# Altium PCB PCB_Hand_control_conversion_module.pcbdoc
Units mm, origin at the board's own origin, x right, y up, seen from the top; angles counter-clockwise.
Board outline 134.37 x 99.02 mm, 2 copper layers (Top Layer, Bottom Layer); 90 components, 95 nets, 316 pads, 615 vias.
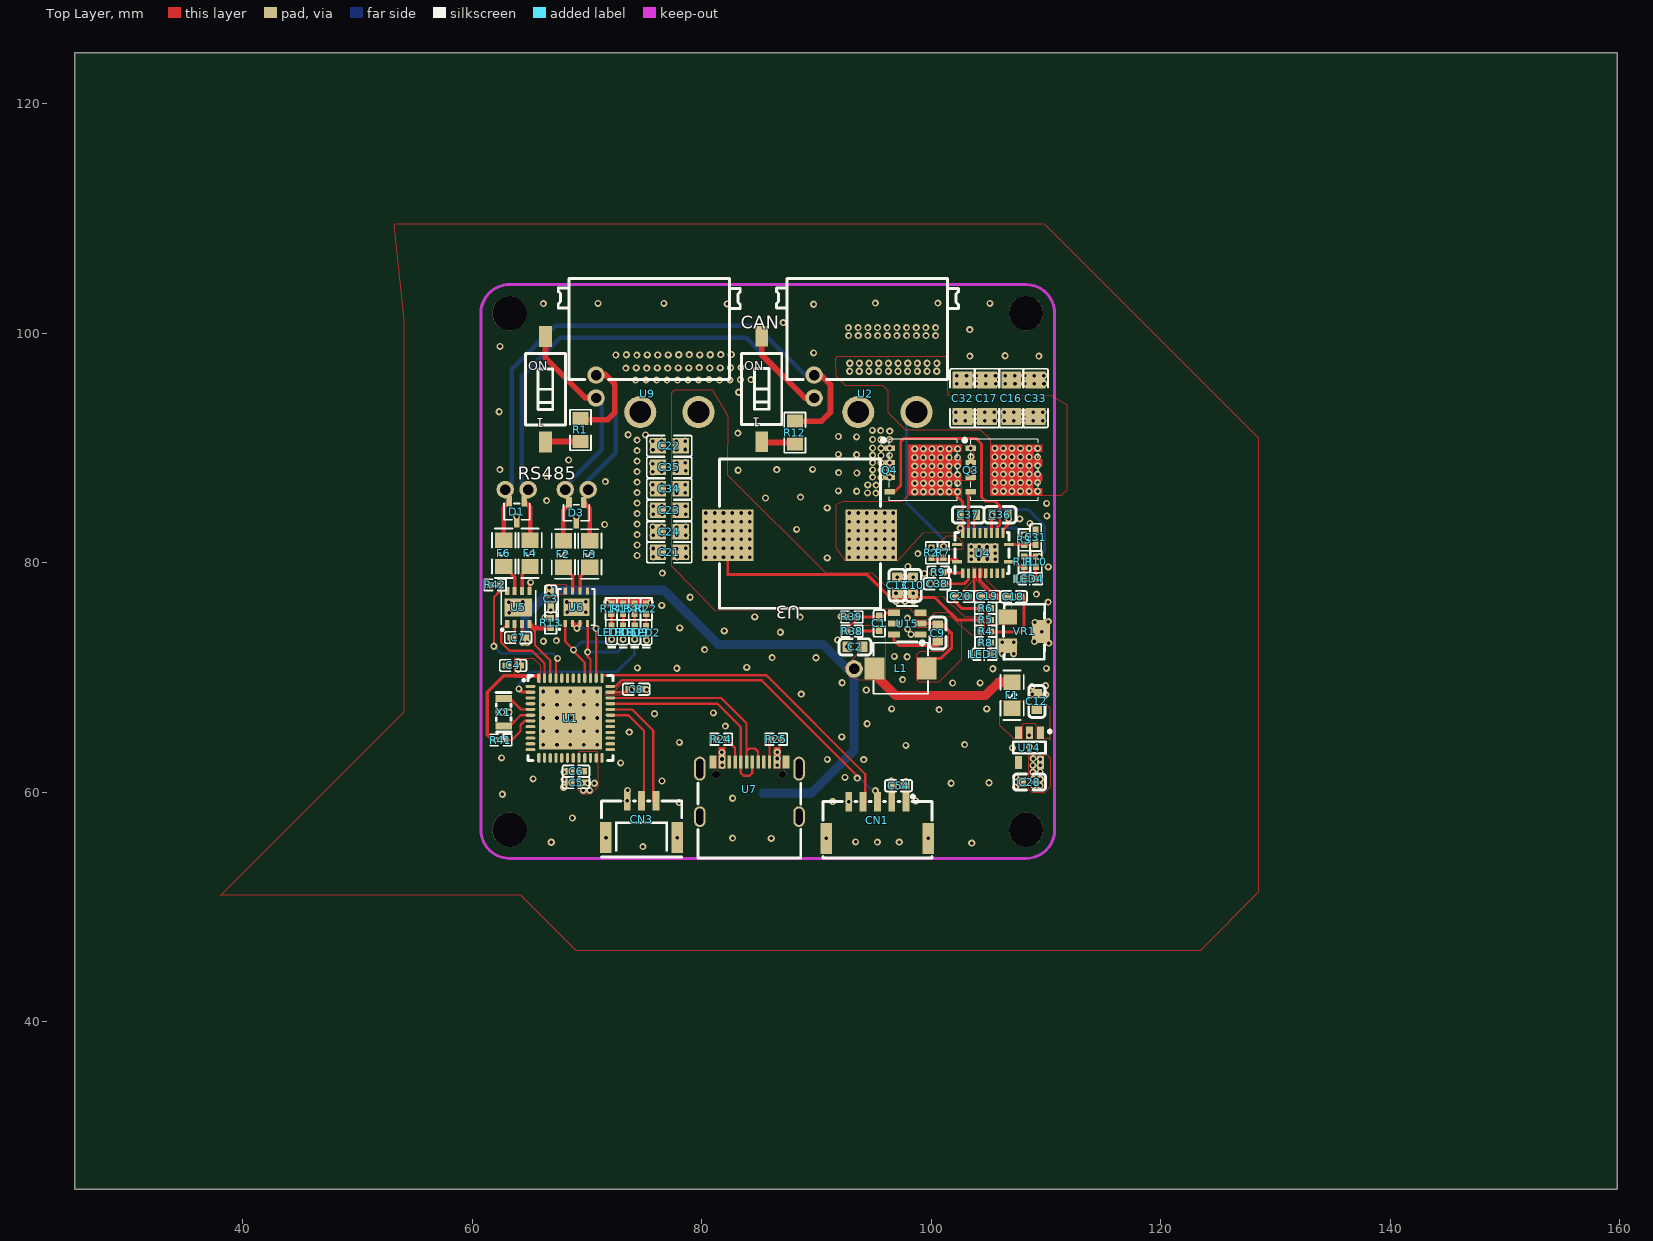
[diagram p0: Top Layer view]
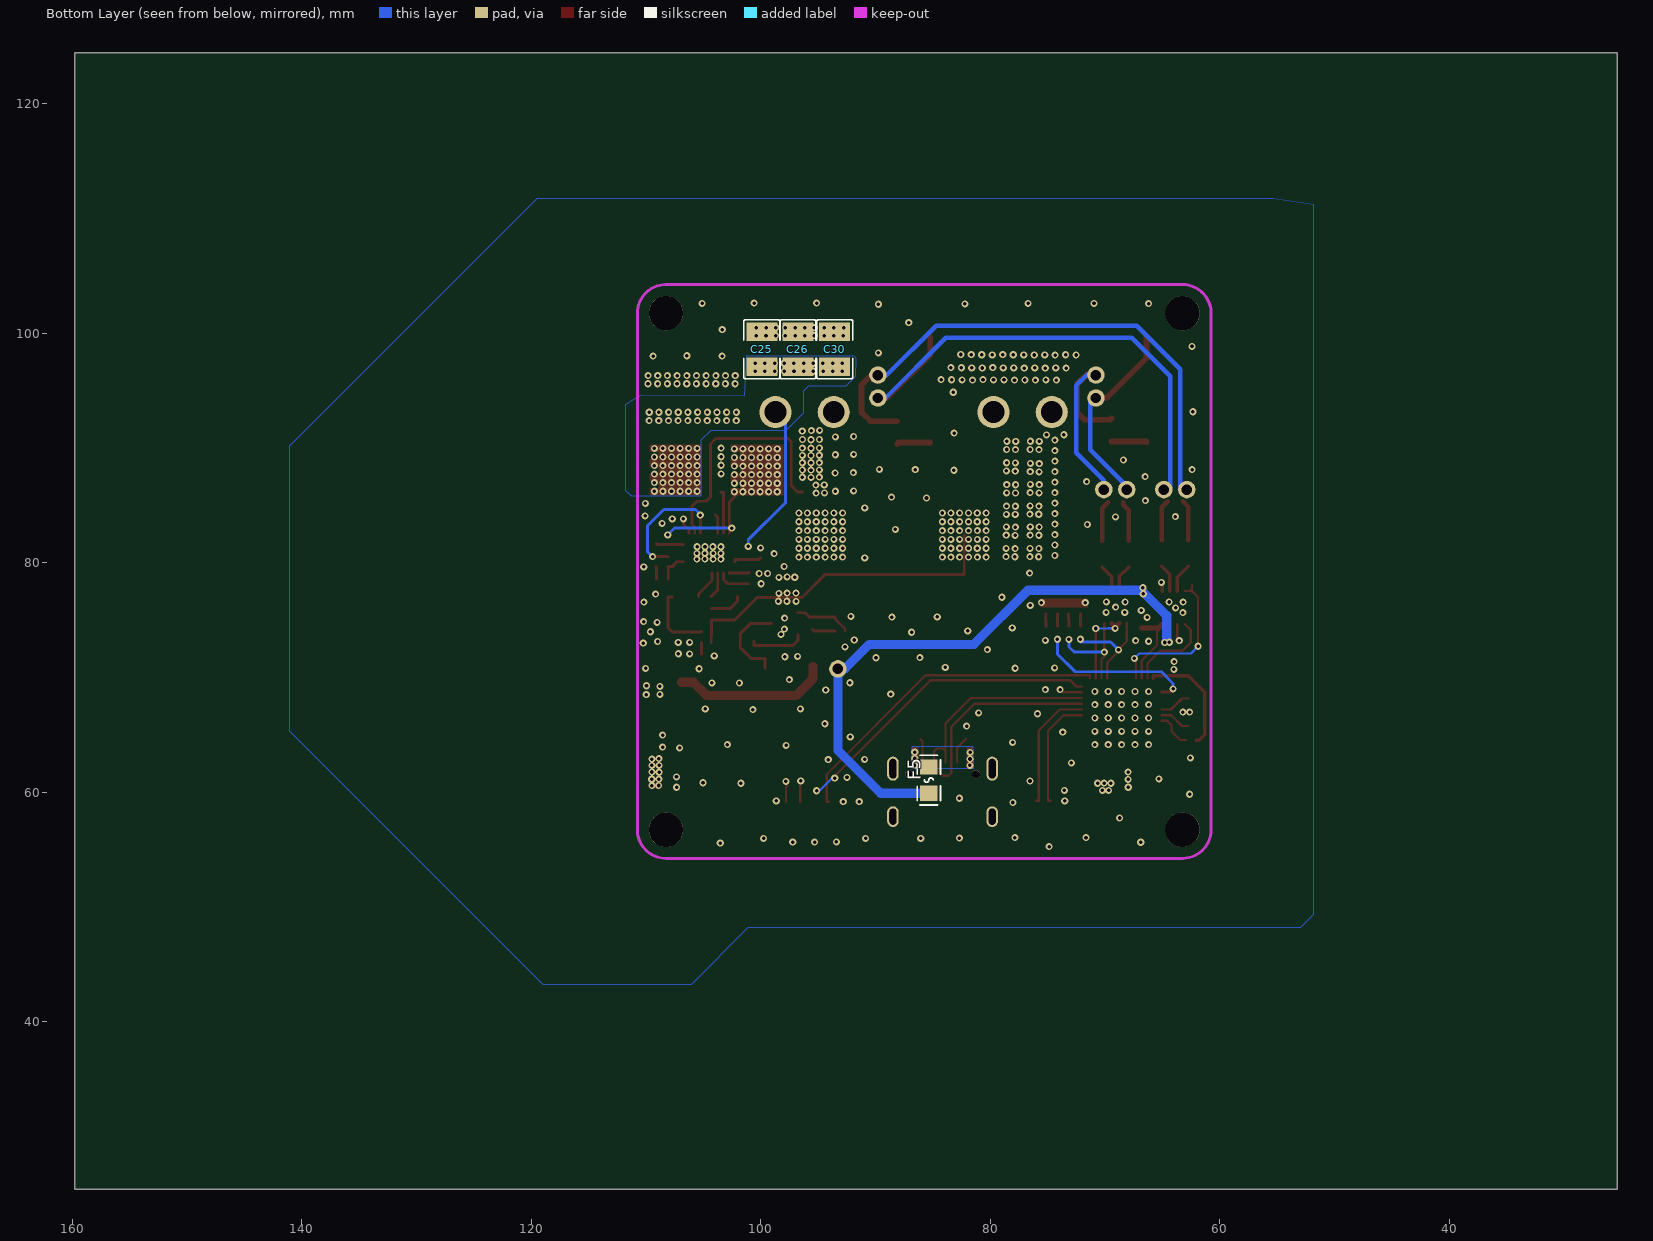
[diagram p1: Bottom Layer view, seen from below]

## Layer stack, top to bottom
Top Layer: signal copper (thickness not stored)
Dielectric: dielectric 0.32, FR-4, Dk 4.8
Bottom Layer: signal copper (thickness not stored)

## Board outline
159.77,25.4 25.4,25.4 25.4,124.42 159.77,124.42

## Components (designator, comment, footprint, x,y, rotation, side; value= is the part's Value field where it differs from the comment)
C1 "47pF" C0402 95.49,74.71 r270 top
C2 "47uF" C0603#1 93.37,72.67 r0 top
C3 "100nF" C0402 66.85,76.86 r270 top
C4 "100nF" C0402 63.58,71.05 r0 top
C5 "100nF" C0402 69.06,60.84 r0 top
C6 "1uF" C0402 69.06,61.84 r0 top
C7 "100nF" C0402 64.02,73.48 r180 top
C8 "100nF" C0402 74.31,68.98 r180 top
C9 "100nF" C0603#1 100.59,73.87 r270 top
C10 "10uF" C0603#1 98.43,78.03 r270 top
C12 "1uF" C0603#1 109.22,67.91 r270 top
C13 "100nF" C0603#1 97.05,78.04 r270 top
C16 "4.7uF" C1206 106.983,94.34 r270 top
C17 "4.7uF" C1206 104.867,94.34 r270 top
C18 "1.2nF" C0402 107.18,77.03 r0 top
C19 "120pF" C0402 104.88,77.06 r180 top
C20 "4.7nF" C0402 102.57,77.06 r0 top
C21 "22uF" C0805 77.19,80.91 r180 top
C22 "22uF" C0805 77.19,90.18 r180 top
C23 "22uF" C0805 77.19,84.57 r180 top
C24 "22uF" C0805 77.19,82.7 r180 top
C25 "100uF" C1210 99.918,98.6 r90 bottom
C26 "100uF" C1210 96.77,98.6 r90 bottom
C28 "1uF" C0603#1 108.59,60.89 r180 top
C30 "100uF" C1210 93.568,98.6 r90 bottom
C31 "12pF" C0402 109.11,82.22 r90 top
C32 "4.7uF" C1206 102.75,94.34 r270 top
C33 "4.7uF" C1206 109.1,94.34 r270 top
C34 "22uF" C0805 77.19,86.44 r180 top
C35 "22uF" C0805 77.19,88.31 r180 top
C36 "2.2uF" C0603#2 106.01,84.18 r180 top
C37 "100nF" C0603#2 103.24,84.17 r180 top
C38 "1uF" C0402 100.52,78.17 r0 top
C54 "100nF" C0402 97.16,60.57 r180 top
CAN "DSIC01LS-P" SW-SMD_DSIC01LS-P 85.24,95.15 r0 top
CN1 "A1257WR-S-5P" CONN-SMD_A1257WR-S-5P 95.32,57.58 r0 top
CN3 "A1257WR-S-3P" CONN-SMD_A1257WR-S-3P 74.77,57.65 r0 top
D1 "TPD2E007DCKR" SOT-323-3_L2.0-W1.3-P1.30-LS2.1-BR 63.9,84.45 r90 top
D3 "TPD2E007DCKR" SOT-323-3_L2.0-W1.3-P1.30-LS2.1-BR 69.09,84.36 r90 top
F1 "JK-SMD0805-050" F0805#1 107.06,68.45 r270 top
F2 "JK-SMD0805-050" F0805#1 67.96,80.76 r90 top
F3 "JK-SMD0805-050" F0805#1 70.26,80.76 r90 top
F4 "JK-SMD0805-050" F0805#1 65.06,80.82 r90 top
F5 "JK-SMD0805-050" F0805#2 85.37,61.06 r270 bottom
F6 "JK-SMD0805-050" F0805#1 62.76,80.82 r90 top
L1 "10uH" IND-SMD_L4.5-W4.5_SMMS0420 97.35,70.8 r0 top
LED2 "TZ-P2-0402RTIA1-0.45T" LED0402-RD_RED 75.17,73.92 r90 top
LED3 "SZYY0402B" LED0402-RD_BLUE 104.63,72.03 r0 top
LED4 "TZ-P2-0402RTIA1-0.45T" LED0402-RD_RED 108.58,78.6 r0 top
LED6 "TZ-P2-0402YGTIA1-0.45T" LED0402-RD_GREEN 73.16,73.93 r90 top
LED8 "TZ-P2-0402 0TIA1-0.45T" LED0402-RD_ORANGE 72.16,73.94 r90 top
LED9 "SZYY0402B" LED0402-RD_BLUE 74.17,73.94 r90 top
Q3 "BSC070N10NS5(ES)" TDSON-8_L5.9-W5.2-P1.27-BL-1 105.24,88.08 r270 top
Q4 "BSC070N10NS5(ES)" TDSON-8_L5.9-W5.2-P1.27-BL-1 98.16,88.08 r270 top
R1 "120Ω" R0805 69.45,91.57 r270 top
R2 "8.25kΩ" R0402 100.03,80.86 r270 top
R3 "511Ω" R0402 108.12,81.99 r270 top
R4 "93.1kΩ" R0402 104.75,74.02 r180 top
R5 "22.1kΩ" R0402 104.75,75.02 r180 top
R6 "8.45kΩ" R0402 104.75,76.03 r180 top
R7 "120kΩ" R0402 101.06,80.87 r90 top
R8 "12.4kΩ" R0402 104.76,73.05 r180 top
R9 "33kΩ" R0402 100.61,79.17 r0 top
R10 "2.2kΩ" R0402 109.15,80.08 r270 top
R11 "20kΩ" R0402 108.11,80.09 r90 top
R12 "120Ω" R0805 88.13,91.34 r270 top
R13 "10kΩ" R0402 66.85,74.75 r270 top
R14 "1kΩ" R0402 72.13,75.98 r90 top
R15 "1kΩ" R0402 73.147,75.98 r90 top
R22 "1kΩ" R0402 75.18,75.98 r270 top
R24 "5.1kΩ" R0402 81.73,64.62 r180 top
R25 "5.1kΩ" R0402 86.52,64.62 r0 top
R38 "100kΩ" R0402 93.11,74.04 r0 top
R39 "13.7kΩ" R0402 93.1,75.28 r0 top
R40 "1kΩ" R0402 74.163,75.98 r90 top
R41 "10kΩ" R0402 62.52,64.55 r180 top
R42 "4.7kΩ" R0402 62.01,78.07 r0 top
RS485 "DSIC01LS-P" SW-SMD_DSIC01LS-P 66.4,95.12 r0 top
U1 "STM32G431CBU6" VQFN-48_L7.0-W7.0-P0.50-BL-EP5.5 68.57,66.47 r270 top
U2 "XT30(2+2)PW-M.G.B" CONN-TH_4P-XT30PW-M 94.27,94.74 r180 top
U3 "5.6uH" IND-SMD_L13.8-W12.6 88.53,82.41 r180 top
U4 "LM5146RGYR" VQFN-20_L4.5-W3.5-P0.50-BL-EP 104.51,80.84 r0 top
U5 "TJA1042TK/3/1J" HVSON-8_L3.0-W3.0-P0.65-BL-EP 64.04,76.1 r0 top
U6 "SIT3088ETK" DFN-8_L3.0-W3.0-P0.65-BL-EP 69.09,76.13 r0 top
U7 "TYPE C-DB-116PWB" USB-TYPE-C-SMD_TYPEC-DB-116PWB 84.17,60.25 r0 top
U9 "XT30(2+2)PW-M.G.B" CONN-TH_4P-XT30PW-M 75.27,94.74 r180 top
U14 "AP2112K-3.3TRG1" SOT-25-5_L2.9-W1.6-P0.95-LS2.8-BL 108.57,63.9 r180 top
U15 "TPS54302DDCR" SOT-23-6_L2.9-W1.6-P0.95-LS2.8-BL 97.92,74.69 r90 top
VR1 "5kΩ" RES-ADJ-SMD_3224W 108.13,74.02 r270 top
X1 "8MHz" OSC-SMD_3P-L3.2-W1.3-P1.20-L 62.76,66.98 r90 top

## Footprints (in the part's own frame and the unit in brackets; to place one, negate y for a bottom-side part, rotate by r counter-clockwise, add the part's x,y. Pads: shape width x height; smd on the part's side, far side on the other; paste and mask are expansions set on the pad)
C0402 [mm]
  rect 0.79x0.54 smd paste-100 mask+0.051: 1(-0.545,0) 2(0.545,0)
  silkscreen extent -1.17,-0.5 1.17,0.5
C0603#1 [mm]
  rect 0.8x0.9 smd paste+0 mask+0.051: 1(-0.7,0) 2(0.7,0)
  silkscreen extent -1.39,-0.71 1.39,0.71
C0603#2 [mm]
  rect 0.6x0.9 smd paste+0 mask+0.051: 1(-0.7,0) 2(0.7,0)
  silkscreen extent -1.39,-0.71 1.39,0.71
C0805 [mm]
  rect 1.41x1.35 smd paste-100 mask+0.051: 1(-1,0) 2(1,0)
  silkscreen extent -1.96,-0.9 1.96,0.9
C1206 [mm]
  rect 1.485x1.728 smd paste-100 mask+0.051: 1(-1.593,0) 2(1.593,0)
  silkscreen extent -2.56,-1.09 2.56,1.09
C1210 [mm]
  rect 1.635x2.7 smd paste-100 mask+0.051: 1(1.517,0) 2(-1.517,0)
  silkscreen extent -2.56,-1.58 2.56,1.58
CONN-SMD_A1257WR-S-3P [mm]
  rect 0.6x1.7 smd paste+0 mask+0.051: 1(1.25,1.6) 2(0,1.6) 3(-1.25,1.6)
  rect 1x2.7 smd paste+0 mask+0.051: 4(3.1,-1.6) 5(-3.1,-1.6)
  silkscreen extent -3.5,-3.3 3.5,1.6
CONN-SMD_A1257WR-S-5P [mm]
  rect 0.6x1.7 smd paste+0 mask+0.051: 1(2.499,1.6) 2(1.25,1.6) 3(0,1.6) 4(-1.25,1.6) 5(-2.499,1.6)
  rect 1x2.7 smd paste+0 mask+0.051: 6(4.45,-1.6) 7(-4.45,-1.6)
  silkscreen extent -4.75,-3.3 4.75,2.17
CONN-TH_4P-XT30PW-M [mil]
  round 110.24 hole 74.8 paste+0 mask+1.97: 1(-175.78,63.59) 2(24.22,63.59)
  round 60 hole 36 paste+0 mask+1.97: 3(175.79,15.16) 4(175.79,-63.58)
  silkscreen extent -319,-395 305,-49
DFN-8_L3.0-W3.0-P0.65-BL-EP [mm]
  rect 0.28x0.625 smd paste+0 mask+0.051: 1(-0.975,-1.412) 2(-0.325,-1.412) 3(0.325,-1.412) 4(0.975,-1.412) 5(0.975,1.412) 6(0.325,1.412) 7(-0.325,1.412) 8(-0.975,1.412)
  rect 2.25x1.5 smd paste+0 mask+0.051: 9(0,0)
  silkscreen extent -1.58,-2.01 1.58,1.58
F0805#1 [mm]
  rect 1.335x1.5 smd paste-100 mask+0.051: 1(-1.142,0) 2(1.142,0)
  silkscreen extent -2.16,-1.02 2.16,1.02
F0805#2 [mm]
  rect 1.335x1.5 smd paste-100 mask+0.051: 1(1.142,0) 2(-1.142,0)
  silkscreen extent -2.16,-1.02 2.16,1.02
HVSON-8_L3.0-W3.0-P0.65-BL-EP [mil]
  rect 14x28 smd paste+0 mask+2: 1(-38.39,-56.4) 2(-12.79,-56.4) 3(12.8,-56.4) 4(38.39,-56.4) 5(38.39,56.4) 6(12.8,56.4) 7(-12.79,56.4) 8(-38.39,56.4)
  rect 94.49x62.99 smd paste+0 mask+2: 9(0,0)
  silkscreen extent -59,-81 59,59
IND-SMD_L4.5-W4.5_SMMS0420 [mm]
  rect 1.724x1.92 smd paste+0 mask+0.051: 1(2.278,0) 2(-2.278,0)
  silkscreen extent -2.38,-2.23 2.38,2.23
IND-SMD_L13.8-W12.6 [mm]
  rect 4.5x4.5 smd paste+0 mask+0.051: 1(-6.25,0) 2(6.25,0)
  silkscreen extent -7.05,-6.63 6.95,6.37
LED0402-RD_BLUE [mm]
  rect 0.636x0.54 smd paste-100 mask+0.051: 1(-0.538,0) 2(0.538,0)
  silkscreen extent -1.39,-0.54 1.09,0.54
LED0402-RD_GREEN [mm]
  rect 0.636x0.54 smd paste-100 mask+0.051: 1(-0.538,0) 2(0.538,0)
  silkscreen extent -1.39,-0.54 1.09,0.54
LED0402-RD_ORANGE [mm]
  rect 0.636x0.54 smd paste-100 mask+0.051: 1(-0.538,0) 2(0.538,0)
  silkscreen extent -1.39,-0.54 1.09,0.54
LED0402-RD_RED [mm]
  rect 0.636x0.54 smd paste-100 mask+0.051: 1(-0.508,0) 2(0.508,0)
  silkscreen extent -1.39,-0.54 1.09,0.54
OSC-SMD_3P-L3.2-W1.3-P1.20-L [mm]
  rect 0.6x1.4 smd paste+0 mask+0.051: 1(-1.199,0) 2(0,0) 3(1.199,0)
  silkscreen extent -2.28,-0.65 1.72,0.66
R0402 [mm]
  rect 0.566x0.54 smd paste-100 mask+0.051: 1(-0.433,0) 2(0.433,0)
  silkscreen extent -0.94,-0.5 0.94,0.5
R0805 [mm]
  rect 1.133x1.377 smd paste-100 mask+0.051: 1(-1,0) 2(1,0)
  silkscreen extent -1.76,-0.92 1.76,0.92
RES-ADJ-SMD_3224W [mm]
  rect 1.3x1.6 smd paste+0 mask+0.051: 1(-1.25,-1.45) 3(1.25,-1.45)
  rect 2x1.6 smd paste+0 mask+0.051: 2(0,1.45)
  silkscreen extent -2.36,-1.82 2.47,1.77
SOT-23-6_L2.9-W1.6-P0.95-LS2.8-BL [mm]
  rect 0.532x1.072 smd paste+0 mask+0.051: 1(-0.95,-1.149) 2(0,-1.149) 3(0.95,-1.149) 4(0.95,1.149) 5(0,1.149) 6(-0.95,1.149)
  silkscreen extent -1.82,-1.45 1.54,0.89
SOT-25-5_L2.9-W1.6-P0.95-LS2.8-BL [mil]
  rect 24.5x43.5 smd paste+0 mask+2: 1(-37.39,-51.18) 2(-0.02,-51.18) 3(37.39,-51.18) 4(37.39,51.18) 5(-37.39,51.18)
  silkscreen extent -75,-60 56,20
SOT-323-3_L2.0-W1.3-P1.30-LS2.1-BR [mm]
  rect 0.936x0.5 smd paste+0 mask+0.051: 1(0.898,-0.65) 2(0.898,0.65) 3(-0.898,0)
  silkscreen extent -0.7,-1.13 0.7,1.13
SW-SMD_DSIC01LS-P [mm]
  rect 1.1x1.8 smd paste+0 mask+0.051: 1(0,-4.6) 2(0,4.6)
  silkscreen extent -1.75,-3.1 1.75,3.1
TDSON-8_L5.9-W5.2-P1.27-BL-1 [mm]
  rect 0.5x0.9 smd paste-100 mask+0.05: 1(-1.905,-1.775) 2(-0.635,-1.775) 3(0.635,-1.775) 4(1.905,-1.775)
  Top Layer region: -2.205,-0.1 2.205,-0.1 2.205,4.45 1.605,4.45 1.605,3.65 0.935,3.65 0.935,4.45 0.335,4.45 0.335,3.65 -0.335,3.65 -0.335,4.45 -0.935,4.45 -0.935,3.65 -1.605,3.65 -1.605,4.45 -2.205,4.45
  silkscreen extent -2.75,-2.46 2.66,4.06
USB-TYPE-C-SMD_TYPEC-DB-116PWB [mm]
  oval 1x2.1 hole 0.6 slot 1.7 at 90 deg paste+0 mask+0.051: 17(4.325,1.805) 20(-4.325,1.805)
  oval 1x1.8 hole 0.6 slot 1.4 at 90 deg paste+0 mask+0.051: 18(4.325,-2.375) 19(-4.325,-2.375)
  rect 0.3x1.14 smd paste-100 mask+0.05: A1(-3.345,2.375) A4(-2.55,2.375) A5(-1.25,2.375) A6(-0.25,2.375) A7(0.25,2.375) A8(1.25,2.375) A9(2.55,2.375) A12(3.355,2.375) B1(3.04,2.375) B4(2.25,2.375) B5(1.75,2.375) B6(0.75,2.375) B7(-0.75,2.375) B8(-1.75,2.375) B9(-2.25,2.375) B12(-3.04,2.375)
  round 0.7 hole 0.7 unplated paste+0: ""(-2.89,1.305) ""(2.89,1.305)
  silkscreen extent -4.47,-5.98 4.47,0.54
VQFN-20_L4.5-W3.5-P0.50-BL-EP [mm]
  rect 0.85x0.28 smd paste+0 mask+0.051: 1(-2.25,-0.752) 10(2.25,-0.752) 11(2.25,0.748) 20(-2.25,0.75)
  rect 0.28x0.85 smd paste+0 mask+0.051: 2(-1.749,-1.75) 3(-1.248,-1.75) 4(-0.749,-1.75) 5(-0.248,-1.75) 6(0.251,-1.75) 7(0.752,-1.75) 8(1.251,-1.75) 9(1.752,-1.75) 12(1.752,1.75) 13(1.251,1.75) 14(0.75,1.748) 15(0.25,1.748) 16(-0.25,1.748) 17(-0.75,1.748) 18(-1.25,1.748) 19(-1.75,1.748)
  rect 2.7x1.7 smd paste+0 mask+0.051: 21(0,-0.002)
  silkscreen extent -3.05,-1.78 2.29,1.78
VQFN-48_L7.0-W7.0-P0.50-BL-EP5.5 [mm]
  oval 0.28x0.85 smd paste-100 mask+0.05: 1(-2.75,-3.475) 2(-2.25,-3.475) 3(-1.75,-3.475) 4(-1.25,-3.475) 5(-0.75,-3.475) 6(-0.25,-3.475) 7(0.25,-3.475) 8(0.75,-3.475) 9(1.25,-3.475) 10(1.75,-3.475) 11(2.25,-3.475) 12(2.75,-3.475) 25(2.75,3.475) 26(2.25,3.475) 27(1.75,3.475) 28(1.25,3.475) 29(0.75,3.475) 30(0.25,3.475) 31(-0.25,3.475) 32(-0.75,3.475) 33(-1.25,3.475) 34(-1.75,3.475) 35(-2.25,3.475) 36(-2.75,3.475)
  oval 0.85x0.28 smd paste-100 mask+0.05: 13(3.475,-2.75) 14(3.475,-2.25) 15(3.475,-1.75) 16(3.475,-1.25) 17(3.475,-0.75) 18(3.475,-0.25) 19(3.475,0.25) 20(3.475,0.75) 21(3.475,1.25) 22(3.475,1.75) 23(3.475,2.25) 24(3.475,2.75) 37(-3.475,2.75) 38(-3.475,2.25) 39(-3.475,1.75) 40(-3.475,1.25) 41(-3.475,0.75) 42(-3.475,0.25) 43(-3.475,-0.25) 44(-3.475,-0.75) 45(-3.475,-1.25) 46(-3.475,-1.75) 47(-3.475,-2.25) 48(-3.475,-2.75)
  rect 5.5x5.5 smd paste-100 mask+0.05: 49(0,0)
  silkscreen extent -3.7,-4.16 3.7,3.7

## Free pads (board coordinates)
  round 1.524 hole 0.914 paste+0 mask+0.05: 3(64.89,86.37) 3(68.12,86.37) 3(93.29,70.75) 4(62.89,86.37) 4(70.12,86.37)
  round 3 hole 3 unplated paste+0: ""(63.27,56.74) ""(63.27,101.74) ""(108.27,56.74) ""(108.27,101.74)

## Via types
v1: diameter 0.62, hole 0.31, Top Layer to Bottom Layer, tented both sides, 615 vias

## Nets (pads, with @x,y where several pads share a name; then routed paths per layer and width w, separated by ;. In a path a pad name is that pad's centre, name@x,y a point inside that pad or via, vN(x,y) a via of type N, cw(c..) or ccw(c..) an arc to the next point about the centre after c; other vN are vias at no path point)
+3.3V: C4.2 C5.2 C6.2 C8.2 C28.1 C54.2 CN1.2 R14.2 R15.2 R22.1 R40.2 R41.2 U1.20 U1.21 U1.23 U1.35 U1.48 U5.5 U14.5 | length 14.1
  Top Layer w0.2: U1.35 73.7,68.72 v1(73.93,68.95) ; CN1.2 96.57,60.525 C54.2
  Top Layer w0.3: R41.2 61.809,64.55 61.339,65.02 61.339,68.731 62.769,70.161 65.819,70.161 U1.48 ; U5.5 65.015,78.195 v1(65.11,78.29)
  other v1: 69.7,60.16 70.24,60.16 108.909,60.588 109.501,60.578 69.51,60.79 70.66,60.79 70.09,60.8 96.53,60.99 109.511,61.134 108.89,61.152 108.871,61.745 109.492,61.764 108.871,62.338 109.501,62.347 109.492,62.883 108.89,62.94 64.02,70.7 63.99,71.39 71.74,76.53 75.56,76.53
+5V: C1.2 C2.2 C3.1 C7.1 F1.1 F5.1 L1.2 pad.3@93.29,70.75 R38.2 U5.3 U6.8 | length 68.5
  Top Layer w0.2: U5.3 64.365,73.495 v1(64.81,73.05)
  Top Layer w0.254: R38.2 95.365,74.04 C1.2
  Top Layer w0.8: L1.2@95.449,70.946 95.449,69.909 96.929,68.428 104.722,68.428 105.883,69.589 F1.1@106.929,69.589
  Bottom Layer w0.8: 64.631,73.32 64.631,75.391 66.851,77.611 76.721,77.611 81.44,72.889 90.559,72.889 92.7,70.75 pad.3@93.29,70.75 ; F5.1 89.557,59.917 93.29,63.65 pad.3@93.29,70.75
  other v1: 64.41,73.07 66.68,77.28 66.72,77.82
A: D3.1 F3.2 pad.4@70.12,86.37 R1.1 U9.4 | length 23.3
  Top Layer w0.4: D3.1@69.739,85.258 70.259,84.738 F3.2
  Top Layer w0.5: R1.1 69.55,92.47 71.82,92.47 72.43,93.08 72.43,95.59 71.615,96.405 U9.4@70.915,96.405
  Bottom Layer w0.4: pad.4@70.12,86.371 70.12,87.184 72.51,89.574 72.51,95.449 71.555,96.404 U9.4@70.915,96.404
B: D3.2 F2.2 pad.3@68.12,86.37 RS485.2 U9.3 | length 21.1
  Top Layer w0.4: F2.2 67.961,84.56 68.441,85.04 D3.2
  Top Layer w0.5: RS485.2 66.401,97.849 69.845,94.405 U9.3@70.915,94.405
  Bottom Layer w0.4: pad.3@68.121,86.371 68.121,86.666 71.311,89.856 71.311,94.405 U9.3@70.915,94.405
C9_1: C9.1 L1.1 U15.2 | length 7.7
  Top Layer w0.254: U15.2@99.068,74.69 100.92,74.69 101.801,73.808 101.801,72.602 100.849,71.649 99.627,71.649 L1.1@99.627,70.801
C9_2: C9.2 U15.6 | length 4.9
  Top Layer w0.254: U15.6 96.772,73.219 97.191,72.8 100.59,72.8 C9.2
C19_2: C19.2 C20.2 U4.4 | length 2.3
  Top Layer w0.254: U4.4 103.761,77.633 C19.2
CAN_STB: R42.2 U1.45 U5.8 | length 14.4
  Top Layer w0.2: v1(61.91,72.72) 61.91,77.001 62.444,77.532 R42.2 62.444,77.707 62.617,77.532 U5.8@63.064,77.532 ; U1.45 67.32,71.53 v1(67.46,71.67)
  Bottom Layer w0.2: v1(61.91,72.72) 62.53,72.1 67.03,72.1 v1(67.46,71.67)
CANH: D1.2 F6.2 pad.4@62.89,86.37 R12.1 U2.4 | length 51.9
  Top Layer w0.4: F6.2 62.76,84.858 D1.2
  Top Layer w0.5: R12.1 90.45,92.34 91.23,93.12 91.23,95.51 90.384,96.356 U2.4
  Bottom Layer w0.4: pad.4@62.891,86.368 63.45,86.368 63.45,96.861 67.239,100.651 84.73,100.651 89.025,96.356 U2.4
CANL: CAN.2 D1.1 F4.2 pad.3@64.89,86.37 U2.3 | length 50.6
  Top Layer w0.4: D1.1@64.549,85.347 65.06,84.837 F4.2@65.06,81.962
  Top Layer w0.5: CAN.2@85.24,99.67 85.24,98.129 89.015,94.354 U2.3@89.805,94.354
  Bottom Layer w0.4: pad.3@64.89,86.368 64.539,86.368 64.331,86.579 64.331,96.239 67.679,99.589 83.909,99.589 89.144,94.354 U2.3@89.805,94.354
F1_2: C12.2 F1.2 U14.1 U14.3
FDCAN_RX: R13.2 U1.46 U5.4 | length 7.4
  Top Layer w0.2: U5.4@65.014,74.667 65.014,74.484 65.489,74.009 65.489,72.81 66.82,71.479 U1.46
  Top Layer w0.4: U5.4 65.365,74.317 R13.2
FDCAN_TX: U1.47 U5.1 | length 7.7
  Top Layer w0.2: U5.1@63.064,74.667 62.54,74.143 62.54,73.059 63.259,72.34 65.22,72.34 66.32,71.24 U1.47
GND: C2.1 C3.2 C4.1 C5.1 C6.1 C7.2 C8.1 C10.1 C12.1 C13.1 C16.1 C17.1 C21.2 C22.2 C23.2 C24.2 C25.1 C26.1 C28.2 C30.1 C31.2 C32.1 C33.1 C34.2 C35.2 C36.1 C38.1 C54.1 CN1.1 CN1.5 CN1.6 CN1.7 CN3.3 CN3.4 CN3.5 D1.3 D3.3 LED2.1 LED3.1 Q4.1 Q4.2 Q4.3 R2.1 R9.1 R13.1 R24.2 R25.2 R39.1 R42.1 U1.49 U2.2 U4.6 U4.12 U4.15 U4.21 U5.2 U5.9 U6.5 U6.9 U7.17 U7.18 U7.19 U7.20 U7.A1 U7.A12 U7.B1 U7.B12 U9.2 U14.2 U15.1 VR1.2 VR1.3 X1.2 | length 4.4
  Top Layer w0.2: v1(63.55,73.21) 63.715,73.376 U5.2 ; C54.1 97.819,60.456 CN1.1
  Top Layer w0.254: U4.12 106.261,82.871 106.76,83.37 v1(106.76,83.82)
  other v1: 74.88,55.26 103.543,55.568 66.9,55.64 95.32,55.65 97.23,55.65 93.42,55.67 86.07,55.98 90.87,55.98 99.77,55.98 82.7,56 71.67,56.05 77.87,56.05 68.75,57.76 78.04,59.11 91.43,59.18 92.821,59.18 73.52,59.25 98.663,59.248 82.7,59.48 62.65,59.83 73.55,60.16 107.35,60.433 67.99,60.44 101.739,60.782 105.045,60.833 97.82,60.95 76.55,60.98 68,61.12 65.32,61.16 92.5,61.29 107.356,61.342 68,61.75 72.94,62.56 94.13,62.85 90.96,62.87 62.58,62.99 107.085,63.872 108.571,63.937 97.802,64.084 66.21,64.15 67.405,64.15 68.57,64.15 69.735,64.15 70.9,64.15 102.914,64.158 78.07,64.35 92.21,64.83 108.568,64.984 73.7,65.24 66.21,65.305 67.405,65.305 68.57,65.305 69.735,65.305 70.9,65.305 82.07,65.77 94.428,65.966 66.21,66.47 67.405,66.47 68.57,66.47 69.735,66.47 70.9,66.47 75.9,66.84 81.03,66.91 62.65,66.98 63.23,66.98 100.703,67.205 96.558,67.26 104.845,67.26 66.21,67.635 67.405,67.635 68.57,67.635 69.735,67.635 70.9,67.635 109.986,68.513 108.808,68.533 88.683,68.552 66.21,68.78 67.405,68.78 68.57,68.78 69.735,68.78 70.9,68.78 94.35,68.91 75.21,68.95 108.801,69.233 109.97,69.278 101.877,69.519 92.25,69.54 104.275,69.535 97.516,69.81 105.383,70.763 110.04,70.793 77.848,70.81 74.407,70.842 83.935,70.885 86.143,71.729 89.97,71.72 97.903,71.806 96.796,71.843 104.068,71.883 106.205,72.052 107.184,72.066 80.272,72.436 92.67,72.67 110.255,73 106.209,73.053 107.206,73.062 109.003,73.137 66.21,73.16 67.35,73.21 75.21,73.24 91.87,73.27 98.25,73.76 86.874,73.947 109.628,73.985 81.979,74.069 97.95,74.21 78.102,74.329 109.047,74.801 110.218,74.877 97.93,75.18 66.35,75.24 88.582,75.259 84.63,75.28 92.156,75.322 63.23,75.66 68.3,75.68 69.92,75.68 66.86,75.85 63.86,76.07 69.09,76.13 76.535,76.288 63.21,76.57 64.43,76.58 68.27,76.58 69.9,76.59 110.201,76.572 79,76.99 109.175,77.267 99.975,78.17 97.05,78.74 98.43,78.73 97.72,78.765 99.42,79.06 100.15,79.06 76.59,79.1 110.212,79.638 97.98,79.67 103.49,80.32 104.171,80.311 104.882,80.323 105.574,80.31 90.955,80.417 75.795,80.525 76.569,80.537 74.39,80.63 98.85,80.8 105.574,80.81 103.49,80.82 104.171,80.811 104.882,80.823 75.779,81.241 76.553,81.254 100.03,81.293 103.49,81.39 104.18,81.39 104.87,81.39 105.56,81.39 74.39,81.544 75.771,82.397 76.545,82.409 74.39,82.458 88.28,82.9 75.755,83.113 76.529,83.126 71.555,83.333 74.39,83.372 108.607,83.429 107.729,83.82 69.1,83.99 63.88,84.02 110.086,84.083 75.788,84.222 76.562,84.234 74.39,84.285 90.95,84.78 75.772,84.938 76.546,84.951 110.066,85.175 74.39,85.199 66.5,85.41 85.57,85.64 88.62,85.72 94.46,86.09 95.185,86.07 74.39,86.113 75.764,86.094 76.538,86.106 93.509,86.232 91.922,86.261 95.205,86.77 94.48,86.79 75.748,86.81 76.522,86.822 74.39,87.027 71.617,87.066 94.91,87.46 95.635,87.44 96.387,87.445 66.52,87.5 93.53,87.82 91.943,87.849 74.39,87.941 75.759,87.923 76.533,87.936 83.19,88.06 94.91,88.095 95.635,88.075 96.387,88.08 62.423,88.114 86.55,88.11 89.67,88.13 75.744,88.639 76.518,88.652 94.91,88.73 95.635,88.71 96.387,88.715 74.39,88.854 68.42,88.95 94.91,89.365 95.635,89.345 96.387,89.35 93.503,89.414 91.916,89.443 74.39,89.768 75.766,89.853 76.54,89.866 94.91,90 95.635,89.98 96.387,89.985 75.747,90.577 76.521,90.589 74.39,90.682 94.91,90.74 95.635,90.72 96.374,90.74 93.507,90.971 91.92,91 75.117,91.138 73.603,91.152 83.17,91.3 96.394,91.465 95.605,91.51 94.88,91.53 62.363,93.156 83.24,94.86 102.25,95.6 103.093,95.6 103.936,95.6 104.78,95.6 105.623,95.6 106.466,95.6 107.31,95.6 108.153,95.6 108.996,95.6 109.839,95.6 74.249,95.91 76.077,95.907 76.991,95.922 77.904,95.911 81.56,95.918 75.163,95.929 78.818,95.927 79.732,95.935 82.474,95.934 83.387,95.942 80.646,95.951 84.301,95.958 102.24,96.3 103.083,96.3 103.926,96.3 104.77,96.3 105.613,96.3 106.456,96.3 107.3,96.3 108.143,96.3 108.986,96.3 109.829,96.3 73.399,96.96 75.227,96.957 77.054,96.961 74.313,96.979 76.141,96.972 77.968,96.977 78.882,96.985 80.71,96.968 81.624,96.984 79.796,97.001 82.537,96.992 83.451,97.008 103.38,98.01 109.39,98.01 106.45,98.04 72.529,98.1 74.357,98.097 76.184,98.101 73.443,98.119 75.271,98.112 77.098,98.117 78.012,98.125 79.84,98.108 80.754,98.124 81.667,98.132 78.926,98.141 82.581,98.148 89.76,98.28 62.435,98.847 92.81,99.79 93.653,99.79 94.496,99.79 95.34,99.79 96.183,99.79 97.026,99.79 97.87,99.79 98.713,99.79 99.556,99.79 100.399,99.79 103.37,100.31 92.8,100.49 93.643,100.49 94.486,100.49 95.33,100.49 96.173,100.49 97.016,100.49 97.86,100.49 98.703,100.49 99.546,100.49 100.389,100.49 87.12,100.92 89.767,102.526 82.223,102.552 66.222,102.582 70.974,102.601 76.714,102.602 105.12,102.6 95.14,102.62 100.59,102.62
LED2_2: LED2.2 R22.2 | length 1.1
  Top Layer w0.254: LED2.2 R22.2
LED8_2: LED8.2 R14.1 | length 1.1
  Top Layer w0.254: R14.1 72.16,75.517 LED8.2
LED9_2: LED9.2 R40.1 | length 1.1
  Top Layer w0.254: LED9.2 R40.1@74.17,75.547
PC13: LED9.1 U1.2 | length 14
  Top Layer w0.254: v1(64.08,69.01) 64.37,68.72 U1.2
  Bottom Layer w0.254: v1(64.08,69.01) 64.08,69.48 65.1,70.5 72.61,70.5 74.17,72.06 v1(74.17,73.33)
R3_1: C37.2 Q3.1 Q3.2 Q3.3 R3.1 U3.1 U4.19 | length 12.8
  Top Layer w0.254: v1(100.071,88.423) 100.071,87.989 102.759,85.299 U4.19@102.759,82.589
  Bottom Layer w0.254: v1(102.54,83.02) 107.524,83.021 v1(108.12,82.423)
  other v1: 92.875,80.497 93.643,80.497 94.411,80.497 95.179,80.497 95.947,80.497 96.685,80.497 92.875,81.265 93.643,81.265 94.411,81.264 95.179,81.264 95.947,81.264 96.685,81.265 92.875,82.032 93.643,82.032 94.411,82.032 95.179,82.032 95.947,82.032 96.685,82.032 92.875,82.8 93.643,82.8 94.411,82.8 95.179,82.8 95.947,82.8 96.685,82.8 92.875,83.568 93.643,83.568 94.411,83.568 95.179,83.568 95.947,83.568 96.685,83.568 92.875,84.336 93.643,84.336 94.411,84.336 95.179,84.336 95.947,84.336 96.685,84.336 98.579,86.185 99.325,86.185 100.071,86.185 100.817,86.185 101.563,86.185 102.309,86.185 98.579,86.931 99.325,86.931 100.071,86.931 100.817,86.931 101.563,86.931 102.309,86.931 98.579,87.677 99.325,87.677 100.071,87.677 100.817,87.677 101.563,87.677 102.309,87.677 103.464,87.748 98.579,88.423 99.325,88.423 100.817,88.423 101.563,88.423 102.309,88.423 103.464,88.493 98.579,89.169 99.325,89.169 100.071,89.169 100.817,89.169 101.563,89.169 102.309,89.169 103.464,89.239 98.579,89.915 99.325,89.915 100.071,89.915 100.817,89.915 101.563,89.915 102.309,89.915 103.464,89.985
R3_2: C31.1 R3.2 U4.11 | length 2.4
  Top Layer w0.254: U4.11 109.023,81.588 C31.1
R4_1: C18.2 R4.1 | length 6.1
  Top Layer w0.254: R4.1@105.182,74.019 105.222,73.981 107.74,73.981 108.09,74.329 108.09,77.029 C18.2@107.724,77.029
R6_1: C18.1 C19.1 R5.1 R6.1 U4.5 VR1.1 | length 2.5
  Top Layer w0.254: U4.5 104.261,78.448 105.425,77.285 C19.1
R6_2: C20.1 R6.2 | length 3
  Top Layer w0.254: C20.1@102.025,77.059 102.025,76.655 102.649,76.031 R6.2@104.316,76.031
R7_1: R2.2 R7.1 U4.1 | length 2.5
  Top Layer w0.254: R2.2 100.158,80.3 102.261,80.3 U4.1@102.261,80.087
R8_1: LED3.2 R8.1 | length 1
  Top Layer w0.254: LED3.2 R8.1
R9_2: R9.2 U4.2 | length 1.8
  Top Layer w0.254: R9.2@101.042,79.17 101.042,79.089 U4.2@102.761,79.089
R10_1: C36.2 R10.1 R11.2 U4.14 | length 11.3
  Top Layer w0.254: U4.14 105.26,84.13 C36.2 105.29,84.16 v1(105.29,84.15) ; R11.2 108.117,80.53 v1(109.44,80.53)
  Bottom Layer w0.254: v1@105.289,84.151 105.289,84.23 105.7,84.639 108.461,84.639 109.871,83.229 109.871,80.961 v1@109.439,80.529
R10_2: LED4.2 R10.2 | length 1.1
  Top Layer w0.254: LED4.2 109.088,79.585 R10.2
R11_1: LED4.1 R11.1 U4.10 | length 2.6
  Top Layer w0.254: U4.10@106.759,80.087 107.303,80.087 107.732,79.658 R11.1 ; LED4.1 108.072,79.619 R11.1
R12_2: CAN.1 R12.2 | length 2.9
  Top Layer w0.5: CAN.1@85.24,90.47 88,90.47 R12.2
R15_1: LED6.2 R15.1 | length 1.1
  Top Layer w0.254: LED6.2 R15.1@73.18,75.538
R24_1: R24.1 U7.A5 | length 2.3
  Top Layer w0.2: R24.1 82.92,63.863 U7.A5
R25_1: R25.1 U7.B5 | length 2.1
  Top Layer w0.2: U7.B5 85.92,64.453 R25.1
S$16733: 
S$16737: 
S$16741: 
S$16745: 
SW1_1: R1.2 RS485.1 | length 3.1
  Top Layer w0.5: RS485.1 66.45,90.57 R1.2
SWCLK: CN1.4 U1.37 | length 29.4
  Top Layer w0.2: U1.37 71.321,70.191 85.649,70.191 94.27,61.57 94.27,59.18 CN1.4@94.069,59.18
SWDIO: CN1.3 U1.36 | length 27.4
  Top Layer w0.2: U1.36 72.49,69.22 73.02,69.75 85.24,69.75 93.57,61.42 v1(93.57,61.24)
  Bottom Layer w0.2: v1(93.57,61.24) 93.79,61.24 94.9,60.13 v1(95.14,60.13)
U1_1: U1.1
U1_3: U1.3
U1_4: U1.4
U1_5: U1.5 X1.3 | length 2.7
  Top Layer w0.2: X1.3 63.301,68.179 64.26,67.22 U1.5
U1_6: U1.6 X1.1 | length 2.7
  Top Layer w0.2: X1.1 63.311,65.781 64.25,66.72 U1.6
U1_7: R41.1 U1.7 | length 3.2
  Top Layer w0.2: R41.1 63.47,64.55 64.23,65.31 64.23,65.85 64.6,66.22 U1.7
U1_8: U1.8
U1_9: U1.9
U1_10: U1.10
U1_11: U1.11
U1_12: U1.12
U1_13: U1.13
U1_14: U1.14
U1_15: U1.15
U1_16: U1.16
U1_17: U1.17
U1_18: U1.18
U1_19: U1.19
U1_22: U1.22
U1_24: U1.24
U1_25: U1.25
U1_26: U1.26
U1_27: U1.27
U1_28: U1.28
U1_29: U1.29
U1_30: U1.30
U1_41: U1.41
U1_42: U1.42
U1_43: U1.43
U1_44: U1.44
U4_3: C38.2 U4.3 | length 2.9
  Top Layer w0.254: C38.2@101.065,78.169 102.891,78.169 103.262,78.543 U4.3@103.262,79.089
U4_9: U4.9
U4_13: Q4.4 U4.13 | length 21.4
  Top Layer w0.254: Q4.4 96.805,86.175 97.359,86.732 97.359,90.559 97.641,90.839 103.919,90.839 104.4,90.359 104.4,85.731 104.77,85.36 105.56,85.36 106,84.921 106,83.341 105.761,83.102 U4.13@105.761,82.589
U4_16: U4.16
U4_17: C37.1 U4.17 | length 1.8
  Top Layer w0.254: U4.17 103.76,83.99 C37.1 103.93,84.16 C37.1@103.93,84.06
U4_18: Q3.4 U4.18 | length 3.8
  Top Layer w0.254: U4.18@103.26,82.588 103.26,86.145 Q3.4@103.465,86.145
U5_6: F4.1 U5.6 | length 2.4
  Top Layer w0.3: U5.6 64.365,78.983 F4.1
U5_7: F6.1 U5.7 | length 2.5
  Top Layer w0.3: F6.1 63.715,78.722 U5.7
U6_6: F3.1 U6.6 | length 2.4
  Top Layer w0.3: U6.6 69.415,78.773 F3.1
U6_7: F2.1 U6.7 | length 2.4
  Top Layer w0.3: F2.1 68.765,78.813 U6.7
U7_A8: U7.A8
U7_B8: U7.B8
U14_4: U14.4
U15_4: C1.1 R38.1 R39.2 U15.4 | length 5
  Top Layer w0.2: R38.1@92.677,74.039 92.677,74.248 93.533,75.104 R39.2@93.533,75.279
  Top Layer w0.254: R39.2 95.79,75.28 96.15,75.64 U15.4@96.771,75.64
U15_5: U15.5
UART1_RX: CN3.1 U1.32 | length 10.9
  Top Layer w0.2: U1.32@72.045,67.219 73.95,67.219 75.789,65.38 75.789,59.249 CN3.1@76.02,59.249
UART1_TX: CN3.2 U1.31 | length 9.8
  Top Layer w0.2: U1.31@72.045,66.719 73.64,66.719 74.989,65.37 74.989,59.249 CN3.2@74.77,59.249
UART4_DE: U1.38 U6.2 U6.3 | length 7.2
  Top Layer w0.2: U1.38 70.82,72.14 v1(70.82,74.27)
  Top Layer w0.4: U6.2 69.14,74.342 v1(69.14,74.28) 69.14,74.442 U6.3
  Bottom Layer w0.2: v1(69.14,74.28) 69.72,74.28 69.73,74.27 v1(70.82,74.27)
UART4_RX: LED8.1 U1.40 U6.1 | length 9.3
  Top Layer w0.2: U6.1 68.116,73.134 v1(68.84,72.41) 68.84,72.29 69.82,71.31 U1.40
  Bottom Layer w0.254: v1(68.84,72.41) 69.52,73.089 72.159,73.089 v1(72.16,73.33)
UART4_TX: LED6.1 U1.39 U6.4 | length 8.8
  Top Layer w0.2: U6.4@70.064,74.717 70.07,74.711 v1(70.07,72.21) 70.07,71.831 70.32,71.581 U1.39
  Bottom Layer w0.254: v1(70.07,72.21) 72.7,72.21 73.16,72.67 v1(73.16,73.32)
USB_D+: U1.34 U7.A6 U7.B6 | length 19.3
  Top Layer w0.2: U1.34 81.72,68.22 83.92,66.02 U7.A6@83.92,62.625 ; U7.A6 83.92,63.58 84.159,63.819 84.662,63.819 84.921,63.56 U7.B6
USB_D-: U1.33 U7.A7 U7.B7 | length 18.4
  Top Layer w0.2: U1.33 81.38,67.72 83.419,65.68 83.419,62.625 83.419,61.69 83.678,61.431 84.181,61.431 84.42,61.669 U7.A7@84.42,62.625
VIN: C16.2 C17.2 C25.2 C26.2 C30.2 C32.2 C33.2 R7.2 U2.1 U4.20 | length 13.9
  Bottom Layer w0.254: U2.1 97.869,93.125 97.869,85.231 101.1,82 v1(101.1,81.43)
  other v1: 105.553,86.23 106.299,86.23 107.045,86.23 107.791,86.23 108.537,86.23 109.283,86.23 105.553,86.976 106.299,86.976 107.045,86.976 107.791,86.976 108.537,86.976 109.283,86.976 105.553,87.722 106.299,87.722 107.045,87.722 107.791,87.722 108.537,87.722 109.283,87.722 105.553,88.468 106.299,88.468 107.045,88.468 107.791,88.467 108.537,88.467 109.283,88.468 105.553,89.213 106.299,89.213 107.045,89.213 107.791,89.213 108.537,89.213 109.283,89.213 105.553,89.959 106.299,89.959 107.045,89.959 107.791,89.959 108.537,89.959 109.283,89.959 102.15,92.39 102.993,92.39 103.836,92.39 104.68,92.39 105.523,92.39 106.366,92.39 107.21,92.39 108.053,92.39 108.896,92.39 109.74,92.39 102.14,93.115 102.983,93.115 103.826,93.115 104.67,93.115 105.513,93.115 106.356,93.115 107.2,93.115 108.043,93.115 108.886,93.115 109.73,93.115 92.899,96.69 93.743,96.69 94.586,96.69 95.429,96.69 96.273,96.69 97.116,96.69 97.959,96.69 98.803,96.69 99.646,96.69 100.489,96.69 92.909,97.38 93.753,97.38 94.596,97.38 95.439,97.38 96.283,97.38 97.126,97.38 97.969,97.38 98.813,97.38 99.656,97.38 100.499,97.38
VOUT: C10.2 C13.2 C21.1 C22.1 C23.1 C24.1 C34.1 C35.1 R4.2 R5.2 R8.2 U3.2 U9.1 U15.3 | length 29.1
  Top Layer w0.254: U3.2@82.281,82.409 82.281,78.99 94.4,78.99 96.409,76.981 100.32,76.981 102.279,75.02 R5.2 ; R4.2 R5.2 ; R4.2@104.318,74.019 R8.2@104.326,73.051
  other v1: 96.93,76.63 97.73,76.64 98.47,76.64 98.43,77.33 96.94,77.35 97.72,77.36 80.375,80.497 81.143,80.497 81.911,80.497 82.679,80.497 83.447,80.497 84.185,80.497 77.871,80.518 78.645,80.53 77.856,81.234 78.63,81.246 80.376,81.265 81.143,81.265 81.911,81.264 82.679,81.264 83.447,81.264 84.185,81.265 80.376,82.032 81.143,82.032 81.911,82.032 82.679,82.032 83.447,82.032 84.185,82.032 77.847,82.389 78.621,82.402 80.376,82.8 81.143,82.8 81.911,82.8 82.679,82.8 83.447,82.8 84.185,82.8 77.832,83.106 78.606,83.118 80.376,83.568 81.143,83.568 81.911,83.568 82.679,83.568 83.447,83.568 84.185,83.568 77.839,84.206 78.613,84.219 80.376,84.336 81.143,84.336 81.911,84.336 82.679,84.336 83.447,84.336 84.185,84.336 77.824,84.922 78.598,84.935 77.815,86.078 78.589,86.091 77.8,86.794 78.574,86.807 77.837,87.984 78.611,87.996 77.822,88.7 78.596,88.713 77.813,89.855 78.587,89.868 77.798,90.572 78.572,90.584
VUSB: F5.2 U7.A4 U7.A9 U7.B4 U7.B9
  other v1: 81.79,62.34 86.58,62.37 81.78,62.9 86.59,62.94 81.77,63.48 86.59,63.5
pads on no net: U4.7 U4.8 U7.
copper on no net: | length 0

## Polygon pours and split planes (outlines as drawn)
GND on Mid-Layer 1 (solid): 47.5,110.58 49.66,108.42 121.41,108.42 147.07,82.76 147.07,48.09 145.8,46.82 45.21,46.82 54.1,55.71 54.1,68.67 54.1,68.8
+3.3V on Mid-Layer 2 (solid): 114.64,63.24 118.36,38.1 63.11,38.1 56.26,44.95 56.26,85.19 60.39,89.32 71.37,89.32 73.19,87.5 73.19,80.75 79.01,75.02 84.76,75 95.99,63.77 114.11,63.77 114.64,63.24
GND on Mid-Layer 2 (solid): 117.18,98.06 117.18,63.39 94.83,63.39 83.53,74.69 80.09,74.69 78.94,75.84 56.727,75.84 56.73,75.71 56.6,75.84 56.727,75.84 56.09,106.57 56.34,106.82 144.36,106.82 136.99,99.33 118.45,99.33 117.18,98.06
R3_1 on Top Layer (solid): 102.63,85.97 102.63,84.85 102.86,83.7 102.89,82.6 101.77,82.59 99.3,82.61 97.07,80.13 92.52,80.17 91.73,81.3 91.74,85.09 92.33,85.37 97.47,85.37 98,85.9 98,90.22 98.07,90.29 98.07,90.23 103.7,90.29 103.7,87.14 102.63,87.13
R6_1 on Top Layer (solid): 104.1,79.48 104.1,78.45 104.16,78.39 104.16,78.29 104.97,77.48 104.97,76.94 105.11,76.8 105.9,76.8 105.9,77.42 104.49,78.83 104.49,79.39 104.33,79.55
C19_2 on Top Layer (solid): 103.61,79.55 103.61,78.66 103.61,78.45 102.74,77.58 102.74,76.77 102.73,76.76 104.75,76.76 104.76,76.75 104.76,77.62 103.96,78.42 103.95,79.48 103.9,79.53
R6_1 on Top Layer (solid): 107,77.53 107,74.72 106.89,74.61 104.95,74.61 104.86,74.7 104.86,76.25 105,76.39 105,77.39 105.03,77.54
VIN on Top Layer (solid): 100.73,81.08 100.73,81.71 101.37,82.35 102.14,82.35 102.74,81.75 102.74,81.25 102.64,81.15 100.99,81.14 100.94,81.09
VOUT on Top Layer (solid): 77.41,94.82 77.68,95.09 80.92,95.09 82.26,92.82 82.22,87.66 90.82,79.11 94.85,79.13 96.23,77.8 98.54,77.84 99.22,77.12 101.02,77.1 102.95,75.3 104.64,75.31 104.61,73.71 103.56,73.7 101.69,75.35 98.79,75.31 98.14,76.02 81.2,75.83 77.41,79.69 77.41,93.58
+5V on Top Layer (solid): 96.01,69.94 95.81,69.74 93.75,69.74 92.94,70 92.47,70.84 93.61,72.09 93.64,73.39 93.26,73.77 93.26,74.32 93.68,74.32 93.91,74.55 95.74,74.55 95.78,74.59 96.01,74.44 96.01,69.94
C9_1 on Top Layer (solid): 98.54,74.43 98.6,74.37 101.08,74.37 101.49,73.96 101.49,72.72 101.03,72.26 99,72.26 98.72,71.98 98.72,71.74 98.72,69.82 98.91,69.63 100.73,69.63 102.68,71.58 102.68,74.79 101.84,75.63 100.33,75.63 99.68,74.98 98.62,74.98
+3.3V on Top Layer (solid): 71.75,68.88 71.78,68.91 72.5,68.91 73.09,69.51 73.9,69.51 74.26,69.15 74.26,68.69 74.03,68.46 71.61,68.46
+3.3V on Top Layer (solid): 69.19,63.37 69.21,63.35 69.21,60.22 69.57,59.86 70.36,59.86 70.98,60.48 70.98,63.42 70.9,63.51 69.29,63.51 69.3,63.5 69.34,63.5
+3.3V on Top Layer (solid): 63.72,71.73 63.76,71.69 65.32,71.69 65.94,71.07 65.94,69.66 65.61,69.99 64.35,69.99 63.74,69.98 63.74,70.69
+5V on Top Layer (solid): 66.45,78.04 66.53,78.12 68.17,78.12 68.27,78.03 68.27,77.21 67.46,77.21 67.19,76.94 66.49,76.94 66.45,76.97 66.44,76.97
F1_2 on Top Layer (solid): 106.129,68 106.18,67.949 108.034,67.949 108.326,67.657 110.054,67.657 110.358,67.365 110.358,64.596 110.308,64.647 109.165,64.647 109.165,65.905 109.088,65.981 108.009,65.981 107.933,65.905 107.933,64.622 107.882,64.673 107.183,64.673 106.002,65.854 106.002,67.911
+3.3V on Top Layer (solid): 108.553,63.277 108.579,63.252 110.128,63.252 110.395,62.985 110.395,60.471 109.836,59.912 109.709,59.912 109.684,59.937 108.807,59.937 108.49,60.255 108.49,63.214
VIN on Top Layer (solid): 91.87,98.01 91.89,97.99 101.26,97.99 101.45,94.56 110.46,94.59 111.83,93.77 111.83,86.33 111.29,85.82 105.25,85.82 105.18,85.89 105.18,90.7 104.34,91.54 97.81,91.54 96.26,93.09 96.26,94.99 95.83,95.42 92.57,95.41 91.72,96.25 91.71,97.79
GND on Top Layer (solid): 53.21,109.44 53.33,109.56 109.85,109.56 128.52,90.89 128.52,51.27 123.44,46.19 69.09,46.19 64.26,51.02 38.1,51.02 54.1,67.02 54.1,101.18
VUSB on Bottom Layer (solid): 81.49,63.93 81.52,63.96 86.82,63.96 86.87,63.91 86.87,62.23 86.72,62.08 81.45,62.08
VIN on Bottom Layer (solid): 91.87,98.01 91.89,97.99 101.26,97.99 101.45,94.56 110.46,94.59 111.83,93.77 111.83,86.33 111.29,85.82 105.25,85.82 105.18,85.89 105.18,90.7 104.34,91.54 97.81,91.54 96.26,93.09 96.26,94.99 95.83,95.42 92.57,95.41 91.72,96.25 91.71,97.79
GND on Bottom Layer (solid): 55.37,111.72 119.51,111.72 141.1,90.13 141.1,65.37 119,43.27 106.04,43.27 101.09,48.22 52.96,48.22 51.82,49.36 51.82,111.21

## Keep-outs
Keep-Out Layer:
  lines w0.254: 60.77,56.75 ccw(c63.27,56.74) 63.21,54.241 ; 60.771,101.8 cw(c63.27,101.74) 63.28,104.24 ; 108.26,54.24 ccw(c108.27,56.74) 110.769,56.68 ; 108.33,104.239 cw(c108.27,101.74) 110.77,101.73

## Other copper
Top Layer:
  rectangle net VUSB: 81.48,62.06 82.07,63.93
  rectangle net VUSB: 86.28,62.08 86.87,63.95
  rectangle net +3.3V: 71.48,76.08 75.65,76.88

## Text inside footprints (layer, text, board x,y; h text height)
CAN: Top Overlay "ON" at 83.716,96.782 h0.8; Top Overlay "1" at 85.113,92.629 h0.8 r180
RS485: Top Overlay "ON" at 64.876,96.752 h0.8; Top Overlay "1" at 66.273,92.599 h0.8 r180